# Altium PCB CM4IOv5.PcbDoc (part 2 of 4)
Units mm, origin at the board's own origin, x right, y up, seen from the top; angles counter-clockwise.
Board outline 160 x 90 mm, 4 copper layers (F.Cu, In1.Cu, In2.Cu, B.Cu); 151 components, 247 nets, 944 pads, 782 vias.
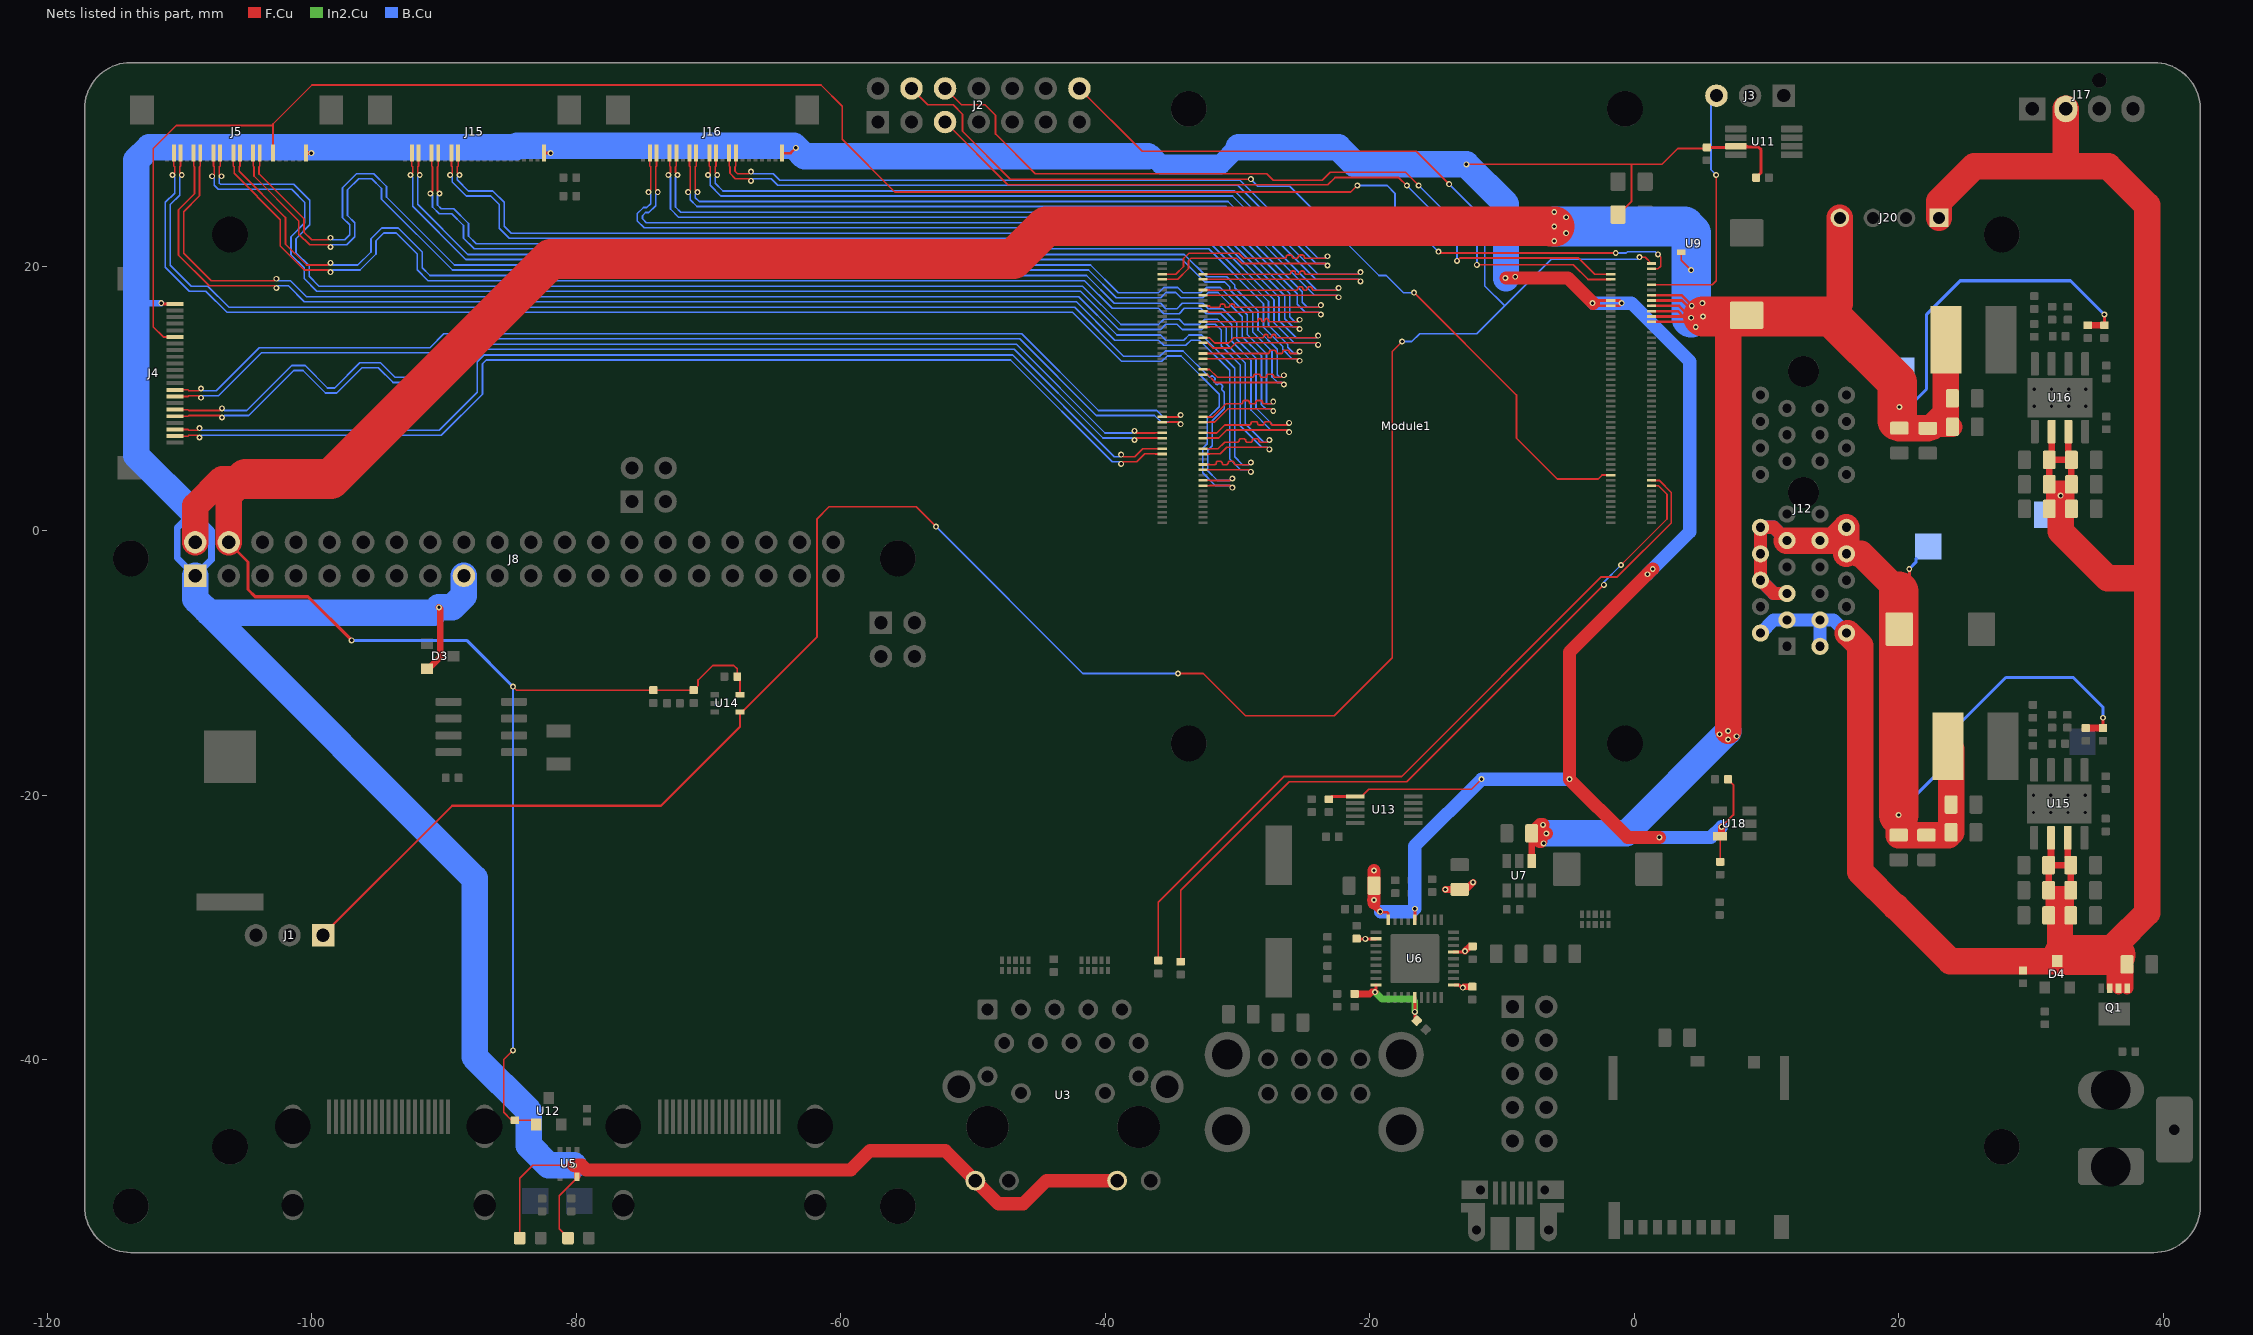
[diagram p4: the nets of this part, all layers, seen from the top]

## Via types
v1: diameter 0.45, hole 0.25, F.Cu to B.Cu, tented both sides, 782 vias

## Nets (pads, with @x,y where several pads share a name; then routed paths per layer and width w, separated by ;. In a path a pad name is that pad's centre, name@x,y a point inside that pad or via, vN(x,y) a via of type N, cw(c..) or ccw(c..) an arc to the next point about the centre after c; other vN are vias at no path point) (continued)
+5v: C2.1 C12.1 C18.1 C22.1 C47.1 C49.1 C51.1 C52.1 C61.1 J8.2 J8.4 J20.4 L5.2 Module1.77 Module1.79 Module1.81 Module1.83 Module1.85 Module1.87 R19.2 R20.2 R27.1 TP4.1 U7.1 U9.5 U12.1 U14.5 | length 367.6
  F.Cu w0.13: C12.1@-84.915,-44.585 -85.5,-44 -85.5,-40 v1(-84.8,-39.3) ; v1(-84.8,-11.8) -84.537,-12.063 R19.2@-74.186,-12.063 R20.2@-71.138,-12.063 -70.804,-11.729 -70.804,-11.304 -69.7,-10.2 -68.1,-10.2 -67.843,-10.457 C22.1@-67.843,-11.04 ; C12.1@-84.635,-44.6 U12.1@-83.35,-44.6 ; U14.5@-67.632,-12.422 C22.1@-67.632,-11.251 ; U9.5@3.55,21.05 3.55,20.45 v1(4.3,19.7)
  F.Cu w0.2: Module1.77@1.3,15.8 4.8,15.8 v1(5.2,16.2) ; Module1.79@1.3,16.2 v1(5.2,16.2) ; Module1.81@1.3,16.6 3.3,16.6 3.7,16.2 ; Module1.83@1.3,17 3.4,17 v1@4.2,16.2 ; Module1.85@1.3,17.4 3.6,17.4 4.8,16.2 ; Module1.87@1.3,17.8 3.6,17.8 v1(5.2,16.2)
  F.Cu w0.23: J8.4@-106.29,-0.93 -104.845,-2.375 -104.845,-4.455 -104.3,-5 -100.3,-5 v1(-97,-8.3) ; C61.1@35.55,15.535 v1(35.55,16.35)
  F.Cu w0.5: U7.1@-7.75,-25 C2.1@-7.75,-22.912 ; R27.1@34.3,15.535 C61.1@35.55,15.535
  F.Cu w1: -7.045,-23.5 -7.162,-23.5 C2.1@-7.762,-22.9 ; v1(-6.9,-22.25) -7.112,-22.25 C2.1@-7.762,-22.9 ; v1(-6.65,-22.9) C2.1@-7.762,-22.9 ; C47.1@23.575,10.487 C47.1@24.063,10 C49.1@24.063,7.85
  F.Cu w1.5: C52.1@22.313,7.85 C49.1@24.063,7.85
  F.Cu w2: J8.2@-108.83,-0.88 -108.83,1.87 -106.8,3.9 -105,3.9 -106.29,2.61 J8.4@-106.29,-0.88 ; v1(7.1,-15.15) 7.1,16.2 ; 14.6,16.2 15.55,17.15 J20.4@15.55,23.65 ; C51.1@20.05,7.75 v1(20.05,9.35) ; C51.1@20.063,7.738 C52.1@22.2,7.737 ; C52.1@22.55,7.85 23.575,8.875 L5.2@23.575,14.45
  F.Cu w3: -105,3.9 -98.583,3.9 -81.941,20.541 -46.959,20.541 -44.481,23.019 -6.337,23.019 -6.318,23 v1@-6,23 ; v1(5.2,16.2) 14.6,16.2 14.9,16.2 19.9,11.2 19.9,8.3
  B.Cu w0.13: v1(-84.8,-39.3) v1@-84.8,-11.75
  B.Cu w0.23: v1(-97,-8.3) -88.3,-8.3 v1(-84.8,-11.8) ; TP4.1@20.15,12.15 20.15,10.55 20.05,10.45 v1(20.05,9.35) 20.75,9.35 22.1,10.7 22.1,16.35 22.125,16.375 24.65,18.9 33,18.9 v1(35.55,16.35)
  B.Cu w2: v1(-6.65,-22.9) -0.6,-22.9 7.1,-15.2 v1(7.1,-15.15)
  B.Cu w3: v1@-6,23 3.8,23 4.3,22.5 v1(4.3,19.7) v1(4.3,16.1)
  other v1: -6.85,-23.65 7.1,-15.8 7.75,-15.55 6.45,-15.4 4.65,15.4 4.35,17 5.15,17.2 -6.05,21.9 -5.15,22.5 -6.05,23 -5.15,23.7 -6.05,24.1
+12v: C25.1 C26.1 C27.1 C28.1 C34.1 C35.1 C37.1 C38.1 C39.1 C40.1 C41.1 C42.1 C43.1 C44.1 D4.1 J12.A2 J12.A3 J12.B1 J12.B2 J12.B3 J17.2 J20.1 Q1.1 Q1.2 Q1.3 TP2.1 U15.2 U15.3 U16.2 U16.3 | length 189.7
  F.Cu w0.23: C40.1@29.4,-33.265 31.285,-33.265 D4.1@32,-32.55
  F.Cu w0.5: C43.1@31.338,-29.012 31.338,-27.163 31.338,-25.312 33.013,-25.312 C28.1@33.013,-27.113 ; C43.1@31.388,-28.962 33.013,-28.962 C28.1@33.013,-27.113 ; C27.1@31.388,-27.113 C28.1@33.013,-27.113 ; C41.1@31.387,1.65 C38.1@31.387,3.5 C34.1@31.387,5.35 C35.1@33.063,5.35 C37.1@33.063,3.55 ; C41.1@31.438,1.7 33.063,1.7 C37.1@33.063,3.55 ; C38.1@31.438,3.55 C37.1@33.063,3.55 ; C25.1@31.515,-25.428 U15.2@31.515,-23.175 ; C34.1@31.565,5.235 U16.2@31.565,7.488 ; C26.1@32.785,-24.677 U15.3@32.785,-23.175 ; C35.1@32.835,5.985 U16.3@32.835,7.488 ; Q1.3@35.975,-34.6 35.975,-32.525 36.4,-32.1
  F.Cu w1: 32.64,27.66 32.75,27.55 ; 36.4,-32.1 37.275,-32.975 Q1.1@37.275,-34.6 ; Q1.2@36.625,-34.6 36.625,-32.325
  F.Cu w2: J12.B2@16.15,-7.75 17.1,-8.7 17.1,-25.813 19.738,-28.45 19.8,-28.45 23.9,-32.55 D4.1@32,-32.55 32.45,-32.1 ; J20.1@23.05,23.65 23.05,24.9 25.7,27.55 32.75,27.55 35.85,27.55 38.8,24.6 38.8,-3.6 ; D4.1@32.2,-32.35 32.2,-28.012 ; v1(32.25,2.65) 32.25,-0.05 35.8,-3.6 38.8,-3.6 ; 32.64,27.66 J17.2@32.64,31.9 ; 36.4,-32.1 36.4,-31.3 38.8,-28.9 38.8,-3.6
  F.Cu w3: 32.45,-32.1 36.4,-32.1
  B.Cu w0.23: TP2.1@32.25,2.2 v1(32.25,2.65)
  B.Cu w1: J12.A2@9.55,-7.75 10.55,-6.75 J12.A3@11.55,-6.75 J12.B3@14.05,-6.75 ; J12.B1@14.05,-8.75 J12.B3@14.05,-6.75 ; J12.B2@16.05,-7.75 15.05,-6.75 J12.B3@14.05,-6.75
/+3.3v: C3.1 C4.1 C6.1 C7.1 C10.1 C11.1 C14.1 C15.1 C23.1 D1.2 D2.2 D3.2 J4.22 J5.22 J8.1 J8.17 J15.22 J16.22 Module1.84 Module1.86 R5.1 R17.1 R21.2 R29.1 U3.15 U3.17 U5.5 U6.5 U6.10 U6.15 U6.23 U6.27 U6.29 U6.36 U11.3 U13.1 U18.5 | length 461.1
  F.Cu w0.13: D1.2@-84.287,-53.5 -84.287,-48.987 -83.3,-48 v1(-80.2,-48) ; D2.2@-80.637,-53.462 -81.3,-52.8 -81.3,-50.3 U5.5@-80.093,-49.093 ; U13.1@-20.5,-20.1 -20.5,-19.968 -20.092,-19.56 -12.31,-19.56 v1(-11.55,-18.8) ; v1(-12.7,27.7) -0.2,27.7 ; R5.1@-1.2,23.9 -0.2,24.9 -0.2,27.7 ; C23.1@5.415,28.9 3.3,28.9 2.1,27.7 -0.2,27.7 ; R17.1@6.5,-25.05 U18.5@6.499,-23.106 ; v1(6.6,-22.4) 7.5,-21.5 7.5,-19.215 R29.1@7.085,-18.8
  F.Cu w0.2: J16.22@-64.45,28.55 -63.81,28.55 v1(-63.405,28.955) ; v1@-19.176,-28.85 -18.7,-28.85 -18.596,-28.954 U6.27@-18.596,-29.43 ; v1@-3.1,17.1 -3.1,17.2 -2.9,17.4 Module1.86@-1.78,17.4 -1.1,17.4 -0.9,17.2 -1.1,17 Module1.84@-1.78,17 -3,17 v1@-3.1,17.1
  F.Cu w0.23: v1(-111.4,17.2) -111.35,17.15 J4.22@-110.35,17.15 ; J15.22@-82.45,28.55 v1(-81.95,28.55) ; C7.1@-22.885,-20.1 U13.1@-21.1,-20.1 ; C14.1@-20.981,-30.868 U6.29@-19.533,-30.868 ; v1(-19.6,-34.9) -19.533,-34.833 U6.36@-19.533,-34.368 ; C15.1@-16.596,-36.919 v1(-16.596,-36.396) U6.5@-16.596,-35.305 ; U6.23@-16.596,-29.43 v1(-16.596,-28.596) ; U6.15@-13.658,-31.868 v1@-12.868,-31.868 ; U6.10@-13.594,-34.368 -13.232,-34.368 -13.2,-34.4 v1@-13.036,-34.564 ; C23.1@5.5,28.985 U11.3@7.598,28.985 ; U11.3@7.688,29.075 8.5,29.075 8.575,29 9.4,29 9.6,28.8 9.6,27.085 R21.2@9.215,26.7
  F.Cu w0.3: J5.22@-100.45,28.55 v1(-100.05,28.55)
  F.Cu w0.5: D3.2@-91.2,-10.45 -90.3,-9.55 -90.3,-5.9 v1(-90.4,-5.8) ; U5.5@-79.95,-48.85 -79.95,-48.405 ; C3.1@-21.15,-35.04 -20.017,-35.04 -19.857,-34.88 v1@-19.6,-34.88 ; v1@-19.7,-27.925 -19.684,-28.342 v1(-19.213,-28.813) ; v1@-19.684,-28.135 C10.1@-19.684,-26.844 ; v1(-14.287,-27.137) C6.1@-13.2,-27.137 ; v1@-12.887,-34.487 C11.1@-12.24,-34.487 ; v1(-12.8,-31.8) C4.1@-12.44,-31.44 ; C6.1@-12.725,-27.137 v1(-12.187,-26.6) ; U18.5@6.6,-23.005 v1(6.6,-22.4)
  F.Cu w1: v1(-80.2,-48) -79.6,-48 -79.25,-48.35 -59.25,-48.35 -57.8,-46.9 -52.09,-46.9 U3.15@-49.83,-49.16 -48.09,-50.9 -46.2,-50.9 -44.46,-49.16 U3.17@-39.11,-49.16 ; v1@-19.7,-27.925 v1(-19.684,-27.941) ; v1@-19.684,-28.135 v1(-19.684,-27.941) ; v1(-19.684,-25.709) C10.1@-19.684,-26.844 v1(-19.684,-27.941) ; v1@-9.7,19.1 -5,19.1 v1@-3.1,17.2 ; v1(1.4,-2.9) -4.9,-9.2 v1(-4.9,-18.8) -0.5,-23.2 v1(1.9,-23.2)
  In2.Cu w0.5: v1(-19.6,-34.9) -19.075,-35.425 -16.775,-35.425 -16.596,-35.604 v1(-16.596,-36.396)
  B.Cu w0.5: -113.3,17.5 -113,17.2 v1(-111.4,17.2) ; v1(-19.684,-27.941) -19.684,-28.342 v1(-19.213,-28.813) ; -110.2,-2.05 J8.1@-108.83,-3.42 -107.6,-2.19 -107.6,0 -109,1.4 -110.2,0.2 -110.2,-2.05
  B.Cu w1: v1@-19.2,-28.8 -19.175,-28.825 -16.825,-28.825 v1(-16.596,-28.596) -16.596,-23.846 v1(-11.55,-18.8) v1(-4.9,-18.8) ; v1@-3.1,17.2 -0.2,17.2 4.2,12.8 4.2,-0.1 v1(1.4,-2.9) v1(1,-3.3) ; v1(1.9,-23.2) 5.8,-23.2 v1(6.6,-22.4)
  B.Cu w1.5: -36.6,28.5 -35.8,27.7 -31.3,27.7 -30,29
  B.Cu w2: -109,1.4 -113.3,5.7 -113.3,17.5 -113.3,28 -112.305,28.995 -93.105,28.995 -93.1,29 ; J8.1@-108.83,-3.42 -108.83,-5.17 -108.7,-5.3 -107.8,-6.2 ; -93,29 -84.809,29 ; J8.17@-88.51,-3.42 -88.51,-4.91 -89.4,-5.8 v1(-90.4,-5.8) -90.8,-6.2 -107.8,-6.2 ; -84.596,28.995 -84.491,29.1 -63.55,29.1 v1(-63.405,28.955) -62.75,28.3 -36.8,28.3 ; v1(-80.2,-48) -82.1,-48 -83.6,-46.5 -83.6,-43.9 -87.7,-39.8 -87.7,-26.3 -107.8,-6.2 ; -29.9,29 -22.4,29 -21.1,27.7 v1(-12.7,27.7) -9.7,24.7 v1@-9.7,19.1
  other v1: -12.964,-34.564 -20.332,-30.868 -3.15,17.2 -0.95,17.2 -9.75,19.1 -9,19.2
/PCIe-connector/+3.3v: C30.1 C31.1 C32.1 C33.1 C45.1 C65.1 J12.A5 J12.A6 J12.A8 J12.A9 J12.A10 J12.B8 J12.B9 J12.B10 L3.2 R24.1 TP1.1 | length 94.8
  F.Cu w0.23: 20,-4.6 20.8,-3.8 v1(20.8,-2.9) ; C65.1@35.45,-14.927 v1(35.45,-14.15) v1@35.45,-14.05
  F.Cu w0.5: 20,-15.443 20,-13.2 20.3,-12.9 ; R24.1@34.15,-14.927 C65.1@35.45,-14.927
  F.Cu w1: J12.A5@11.55,-4.75 10.55,-4.75 J12.A6@9.55,-3.75 J12.A8@9.55,-1.75 J12.A10@9.55,0.25 10.55,0.25 J12.A9@11.55,-0.75
  F.Cu w2: J12.A9@11.55,-0.75 J12.B9@14.05,-0.75 15.05,-0.75 J12.B10@16.05,0.25 J12.B8@16.05,-1.75 ; 16.969,-1.75 17.15,-1.75 20,-4.6 ; v1(20,-21.5) C33.1@20,-23.025 C31.1@23.75,-23.025 ; C31.1@23.963,-22.812 C30.1@23.963,-20.713 L3.2@23.963,-16.55
  F.Cu w3: v1(20,-21.5) 20,-15.5 ; 20,-15.443 20,-4.6
  B.Cu w0.23: v1(20,-21.5) 20,-21.3 23.7,-17.6 23.7,-15.5 28.1,-11.1 33.2,-11.1 35.45,-13.35 v1(35.45,-14.15) ; v1(20.8,-2.9) 21.3,-2.4 TP1.1@21.3,-2.1
  B.Cu w1: J12.A5@11.55,-4.75 10.55,-4.75 J12.A6@9.55,-3.75 J12.A10@9.55,0.25 10.55,0.25 J12.A9@11.55,-0.75 J12.B9@14.05,-0.75 15.05,-0.75 J12.B10@16.05,0.25 J12.B8@16.05,-1.75
AIN0: J2.5 Module1.96 | length 56.9
  F.Cu w0.13: J2.5@-52.12,30.9 -47.38,26.16 -23.172,26.16 -22.632,26.7 -17.8,26.7 v1(-17.2,26.1) ; v1(-13.4,20.4) -13.175,20.625 -4.225,20.625 -3,19.4 Module1.96@-1.78,19.4
  B.Cu w0.13: v1(-17.2,26.1) -13.4,22.3 v1(-13.4,20.4)
AIN1: J2.6 Module1.94 | length 58.6
  F.Cu w0.13: J2.6@-52.12,33.44 -50.88,32.2 -49.1,32.2 -48.3,31.4 -48.3,30 -45.3,27 -27.8,27 -27.3,26.5 -23.6,26.5 -23,27.1 -17.3,27.1 v1(-16.3,26.1) ; v1(-11.9,20.1) -4.6,20.1 -3.5,19 Module1.94@-1.78,19
  B.Cu w0.13: v1(-16.3,26.1) -11.9,21.7 v1(-11.9,20.1)
BT_nDis: J3.3 Module1.91 | length 18.8
  F.Cu w0.13: Module1.91@1.3,18.6 5.9,18.6 6.2,18.9 v1(6.2,26.9)
  B.Cu w0.13: J3.3@5.8,32.48 5.8,27.3 v1(6.2,26.9)
CAM0_C_N: J4.8 Module1.140 | length 82.1
  F.Cu w0.127: J4.8@-110.35,10.15 -109.375,10.15 -109.315,10.21 -108.56,10.21 v1(-108.4,10.05) ; Module1.140@-35.7,8.2 -35.175,8.2 -35.165,8.21 -34.46,8.21 v1(-34.3,8.05)
  B.Cu w0.127: v1(-108.4,10.05) -108.24,10.21 -107.071,10.21 -103.821,13.46 -90.921,13.46 -89.871,14.51 -46.479,14.51 -40.679,8.71 -36.279,8.71 -35.779,8.21 -34.46,8.21 v1(-34.3,8.05)
CAM0_C_P: J4.9 Module1.142 | length 82.1
  F.Cu w0.127: J4.9@-110.35,10.65 -109.375,10.65 -109.315,10.59 -108.56,10.59 v1(-108.4,10.75) ; Module1.142@-35.7,8.6 -35.175,8.6 -35.165,8.59 -34.46,8.59 v1(-34.3,8.75)
  B.Cu w0.127: v1(-108.4,10.75) -108.24,10.59 -107.229,10.59 -103.979,13.84 -91.079,13.84 -90.029,14.89 -46.321,14.89 -40.521,9.09 -36.121,9.09 -35.621,8.59 -34.46,8.59 v1(-34.3,8.75)
CAM0_D0_N: J4.2 Module1.128 | length 82.1
  F.Cu w0.127: J4.2@-110.35,7.15 -109.375,7.15 -109.315,7.21 -108.66,7.21 v1(-108.5,7.05) ; v1(-38.8,5.05) -38.64,5.21 -37.621,5.21 -37.021,5.81 -36.235,5.81 -36.225,5.8 Module1.128@-35.7,5.8
  B.Cu w0.127: v1(-108.5,7.05) -108.34,7.21 -90.221,7.21 -87.11,10.321 -87.11,12.621 -86.821,12.91 -47.179,12.91 -39.479,5.21 -38.96,5.21 v1(-38.8,5.05)
CAM0_D0_P: J4.3 Module1.130 | length 82.1
  F.Cu w0.127: J4.3@-110.35,7.65 -109.375,7.65 -109.315,7.59 -108.66,7.59 v1(-108.5,7.75) ; v1(-38.8,5.75) -38.64,5.59 -37.779,5.59 -37.179,6.19 -36.235,6.19 -36.225,6.2 Module1.130@-35.7,6.2
  B.Cu w0.127: v1(-108.5,7.75) -108.34,7.59 -90.379,7.59 -87.49,10.479 -87.49,12.779 -86.979,13.29 -47.021,13.29 -39.321,5.59 -38.96,5.59 v1(-38.8,5.75)
CAM0_D1_N: J4.5 Module1.134 | length 82.1
  F.Cu w0.127: J4.5@-110.35,8.65 -109.375,8.65 -109.315,8.71 -106.96,8.71 v1(-106.8,8.55) ; v1(-37.8,6.85) -37.64,7.01 -36.235,7.01 -36.225,7 Module1.134@-35.7,7
  B.Cu w0.127: v1(-106.8,8.55) -106.64,8.71 -104.771,8.71 -101.371,12.11 -100.679,12.11 -98.979,10.41 -98.121,10.41 -96.221,12.31 -94.979,12.31 -93.879,11.21 -91.271,11.21 -88.771,13.71 -46.879,13.71 -40.179,7.01 -37.96,7.01 v1(-37.8,6.85)
CAM0_D1_P: J4.6 Module1.136 | length 82.1
  F.Cu w0.127: J4.6@-110.35,9.15 -109.375,9.15 -109.315,9.09 -106.96,9.09 v1(-106.8,9.25) ; v1(-37.8,7.55) -37.64,7.39 -36.235,7.39 -36.225,7.4 Module1.136@-35.7,7.4
  B.Cu w0.127: v1(-106.8,9.25) -106.64,9.09 -104.929,9.09 -101.529,12.49 -100.521,12.49 -98.821,10.79 -98.279,10.79 -96.379,12.69 -94.821,12.69 -93.721,11.59 -91.429,11.59 -88.929,14.09 -46.721,14.09 -40.021,7.39 -37.96,7.39 v1(-37.8,7.55)
CAM1_C_N: J5.8 Module1.127 | length 104.3
  F.Cu w0.127: v1(-107.55,26.8) -107.39,26.96 -107.39,27.515 -107.45,27.575 J5.8@-107.45,28.55 ; Module1.127@-32.62,5.8 -32.095,5.8 -32.085,5.81 -31.321,5.81 -30.821,6.31 -27.76,6.31 v1(-27.6,6.15)
  B.Cu w0.127: v1(-107.55,26.8) -107.39,26.64 -107.39,26.121 -107.079,25.81 -101.529,25.81 -100.54,24.821 -100.54,23.279 -101.59,22.229 -101.59,20.871 -100.59,19.871 -100.59,19.071 -99.629,18.11 -41.879,18.11 -38.979,15.21 -35.821,15.21 -35.421,15.61 -34.579,15.61 -34.179,15.21 -32.721,15.21 -32.321,15.61 -31.679,15.61 -31.24,15.171 -31.24,13.971 -29.79,12.521 -29.79,7.921 -28.179,6.31 -27.76,6.31 v1(-27.6,6.15)
CAM1_C_P: J5.9 Module1.129 | length 104.2
  F.Cu w0.127: J5.9@-106.95,28.55 -106.95,27.575 -107.01,27.515 -107.01,26.96 v1(-106.85,26.8) ; Module1.129@-32.62,6.2 -32.095,6.2 -32.085,6.19 -31.479,6.19 -30.979,6.69 -30.01,6.69 -29.982,6.693 -29.956,6.702 -29.932,6.717 -29.912,6.737 -29.897,6.761 -29.888,6.787 -29.882,6.843 -29.873,6.869 -29.858,6.893 -29.838,6.913 -29.814,6.928 -29.788,6.937 -29.76,6.94 -29.51,6.94 -29.482,6.937 -29.456,6.928 -29.432,6.913 -29.412,6.893 -29.397,6.869 -29.388,6.843 -29.382,6.787 -29.373,6.761 -29.358,6.737 -29.338,6.717 -29.314,6.702 -29.288,6.693 -29.26,6.69 -29.01,6.69 -28.982,6.693 -28.956,6.702 -28.932,6.717 -28.912,6.737 -28.897,6.761 -28.888,6.787 -28.882,6.843 -28.873,6.869 -28.858,6.893 -28.838,6.913 -28.814,6.928 -28.788,6.937 -28.76,6.94 -28.51,6.94 -28.482,6.937 -28.456,6.928 -28.432,6.913 -28.412,6.893 -28.397,6.869 -28.388,6.843 -28.382,6.787 -28.373,6.761 -28.358,6.737 -28.338,6.717 -28.314,6.702 -28.288,6.693 -28.26,6.69 -27.76,6.69 v1(-27.6,6.85)
  B.Cu w0.127: v1(-106.85,26.8) -107.01,26.64 -107.01,26.279 -106.921,26.19 -101.371,26.19 -100.16,24.979 -100.16,23.121 -101.21,22.071 -101.21,21.029 -100.21,20.029 -100.21,19.229 -99.471,18.49 -41.721,18.49 -38.821,15.59 -35.979,15.59 -35.579,15.99 -34.421,15.99 -34.021,15.59 -32.879,15.59 -32.479,15.99 -31.521,15.99 -30.86,15.329 -30.86,14.129 -29.41,12.679 -29.41,8.079 -28.021,6.69 -27.76,6.69 v1(-27.6,6.85)
CAM1_D0_N: J5.2 Module1.115 | length 104.5
  F.Cu w0.127: v1(-110.55,26.9) -110.39,27.06 -110.39,27.515 -110.45,27.575 J5.2@-110.45,28.55 ; Module1.115@-32.62,3.4 -32.095,3.4 -32.085,3.41 -30.56,3.41 v1(-30.4,3.25)
  B.Cu w0.127: v1(-110.55,26.9) -110.39,26.74 -110.39,25.529 -111.09,24.829 -111.09,19.921 -109.279,18.11 -108.029,18.11 -106.429,16.51 -42.479,16.51 -38.779,12.81 -35.721,12.81 -35.321,13.21 -34.279,13.21 -31.39,10.321 -31.39,9.379 -32.29,8.479 -32.29,6.579 -32.64,6.229 -32.64,4.371 -31.679,3.41 -30.56,3.41 v1(-30.4,3.25)
CAM1_D0_P: J5.3 Module1.117 | length 104.5
  F.Cu w0.127: J5.3@-109.95,28.55 -109.95,27.575 -110.01,27.515 -110.01,27.06 v1(-109.85,26.9) ; Module1.117@-32.62,3.8 -32.095,3.8 -32.085,3.79 -30.56,3.79 v1(-30.4,3.95)
  B.Cu w0.127: v1(-109.85,26.9) -110.01,26.74 -110.01,25.371 -110.71,24.671 -110.71,20.079 -109.121,18.49 -107.871,18.49 -106.271,16.89 -42.321,16.89 -38.621,13.19 -35.879,13.19 -35.479,13.59 -34.121,13.59 -32.191,11.66 -32.169,11.642 -32.144,11.63 -32.117,11.624 -32.089,11.624 -32.061,11.63 -32.036,11.642 -31.992,11.677 -31.967,11.689 -31.94,11.695 -31.912,11.695 -31.885,11.689 -31.859,11.677 -31.837,11.66 -31.731,11.554 -31.714,11.532 -31.702,11.506 -31.696,11.479 -31.696,11.451 -31.702,11.424 -31.714,11.399 -31.749,11.355 -31.761,11.33 -31.767,11.302 -31.767,11.274 -31.761,11.247 -31.749,11.222 -31.731,11.2 -31.625,11.094 -31.603,11.077 -31.578,11.064 -31.551,11.058 -31.523,11.058 -31.496,11.064 -31.47,11.077 -31.427,11.111 -31.401,11.124 -31.374,11.13 -31.346,11.13 -31.319,11.124 -31.294,11.111 -31.272,11.094 -31.166,10.988 -31.148,10.966 -31.136,10.941 -31.13,10.914 -31.13,10.886 -31.136,10.858 -31.148,10.833 -31.183,10.789 -31.195,10.764 -31.201,10.737 -31.201,10.709 -31.195,10.681 -31.183,10.656 -31.166,10.634 -31.01,10.479 -31.01,9.221 -31.91,8.321 -31.91,6.421 -32.26,6.071 -32.26,4.529 -31.521,3.79 -30.56,3.79 v1(-30.4,3.95)
CAM1_D1_N: J5.5 Module1.121 | length 104.2
  F.Cu w0.127: J5.5@-108.95,28.55 -108.95,27.575 -108.89,27.515 -108.89,25.479 -110.09,24.279 -110.09,20.821 -107.779,18.51 -102.86,18.51 v1(-102.7,18.35) ; Module1.121@-32.62,4.6 -32.095,4.6 -32.085,4.61 -29.16,4.61 v1(-29,4.45)
  B.Cu w0.127: v1(-102.7,18.35) -102.54,18.51 -101.779,18.51 -100.579,17.31 -42.179,17.31 -39.279,14.41 -35.979,14.41 -35.579,14.01 -33.921,14.01 -33.521,14.41 -32.879,14.41 -30.59,12.121 -30.59,5.421 -29.779,4.61 -29.16,4.61 v1(-29,4.45)
CAM1_D1_P: J5.6 Module1.123 | length 104.1
  F.Cu w0.127: J5.6@-108.45,28.55 -108.45,27.575 -108.51,27.515 -108.51,25.321 -109.71,24.121 -109.71,20.979 -107.621,18.89 -102.86,18.89 v1(-102.7,19.05) ; Module1.123@-32.62,5 -32.095,5 -32.085,4.99 -31.74,4.99 -31.712,4.993 -31.686,5.002 -31.662,5.017 -31.642,5.037 -31.627,5.061 -31.618,5.087 -31.612,5.143 -31.603,5.169 -31.588,5.193 -31.568,5.213 -31.544,5.228 -31.518,5.237 -31.49,5.24 -31.29,5.24 -31.262,5.237 -31.236,5.228 -31.212,5.213 -31.192,5.193 -31.177,5.169 -31.168,5.143 -31.162,5.087 -31.153,5.061 -31.138,5.037 -31.118,5.017 -31.094,5.002 -31.068,4.993 -31.04,4.99 -30.84,4.99 -30.812,4.993 -30.786,5.002 -30.762,5.017 -30.742,5.037 -30.727,5.061 -30.718,5.087 -30.712,5.143 -30.703,5.169 -30.688,5.193 -30.668,5.213 -30.644,5.228 -30.618,5.237 -30.59,5.24 -30.39,5.24 -30.362,5.237 -30.336,5.228 -30.312,5.213 -30.292,5.193 -30.277,5.169 -30.268,5.143 -30.262,5.087 -30.253,5.061 -30.238,5.037 -30.218,5.017 -30.194,5.002 -30.168,4.993 -30.14,4.99 -29.16,4.99 v1(-29,5.15)
  B.Cu w0.127: v1(-102.7,19.05) -102.54,18.89 -101.621,18.89 -100.421,17.69 -42.021,17.69 -39.121,14.79 -35.821,14.79 -35.421,14.39 -34.079,14.39 -33.679,14.79 -32.721,14.79 -30.21,12.279 -30.21,5.579 -29.621,4.99 -29.16,4.99 v1(-29,5.15)
CAM1_D2_N: J5.11 Module1.133 | length 104.5
  F.Cu w0.127: J5.11@-105.95,28.55 -105.95,27.575 -105.89,27.515 -105.89,27.021 -102.39,23.521 -102.39,21.521 -100.579,19.71 -98.76,19.71 v1(-98.6,19.55) ; Module1.133@-32.62,7 -32.095,7 -32.085,7.01 -31.421,7.01 -30.821,7.61 -26.26,7.61 v1(-26.1,7.45)
  B.Cu w0.127: v1(-98.6,19.55) -98.44,19.71 -96.371,19.71 -95.16,20.921 -95.16,21.921 -94.571,22.51 -93.629,22.51 -92.04,20.921 -92.04,19.721 -91.229,18.91 -41.579,18.91 -39.479,16.81 -35.979,16.81 -35.579,16.41 -34.421,16.41 -34.021,16.81 -32.779,16.81 -32.379,16.41 -31.279,16.41 -30.44,15.571 -30.44,14.321 -28.99,12.871 -28.99,9.121 -27.479,7.61 -26.26,7.61 v1(-26.1,7.45)
CAM1_D2_P: J5.12 Module1.135 | length 104.4
  F.Cu w0.127: J5.12@-105.45,28.55 -105.45,27.575 -105.51,27.515 -105.51,27.179 -102.01,23.679 -102.01,21.679 -100.421,20.09 -98.76,20.09 v1(-98.6,20.25) ; Module1.135@-32.62,7.4 -32.095,7.4 -32.085,7.39 -31.579,7.39 -30.979,7.99 -29.11,7.99 -29.082,7.993 -29.056,8.002 -29.032,8.017 -29.012,8.037 -28.997,8.061 -28.988,8.087 -28.982,8.143 -28.973,8.169 -28.958,8.193 -28.938,8.213 -28.914,8.228 -28.888,8.237 -28.86,8.24 -28.61,8.24 -28.582,8.237 -28.556,8.228 -28.532,8.213 -28.512,8.193 -28.497,8.169 -28.488,8.143 -28.482,8.087 -28.473,8.061 -28.458,8.037 -28.438,8.017 -28.414,8.002 -28.388,7.993 -28.36,7.99 -28.11,7.99 -28.082,7.993 -28.056,8.002 -28.032,8.017 -28.012,8.037 -27.997,8.061 -27.988,8.087 -27.982,8.143 -27.973,8.169 -27.958,8.193 -27.938,8.213 -27.914,8.228 -27.888,8.237 -27.86,8.24 -27.61,8.24 -27.582,8.237 -27.556,8.228 -27.532,8.213 -27.512,8.193 -27.497,8.169 -27.488,8.143 -27.482,8.087 -27.473,8.061 -27.458,8.037 -27.438,8.017 -27.414,8.002 -27.388,7.993 -27.36,7.99 -26.26,7.99 v1(-26.1,8.15)
  B.Cu w0.127: v1(-98.6,20.25) -98.44,20.09 -96.529,20.09 -95.54,21.079 -95.54,22.079 -94.729,22.89 -93.471,22.89 -91.66,21.079 -91.66,19.879 -91.071,19.29 -41.421,19.29 -39.321,17.19 -35.821,17.19 -35.421,16.79 -34.579,16.79 -34.179,17.19 -32.621,17.19 -32.221,16.79 -31.121,16.79 -30.06,15.729 -30.06,14.479 -28.61,13.029 -28.61,9.279 -27.321,7.99 -26.26,7.99 v1(-26.1,8.15)
CAM1_D3_N: J5.14 Module1.139 | length 103.9
  F.Cu w0.127: J5.14@-104.45,28.55 -104.45,27.575 -104.39,27.515 -104.39,26.821 -100.99,23.421 -100.99,22.421 -100.179,21.61 -98.76,21.61 v1(-98.6,21.45) ; Module1.139@-32.62,8.2 -32.095,8.2 -32.085,8.21 -31.721,8.21 -30.721,9.21 -27.46,9.21 v1(-27.3,9.05)
  B.Cu w0.127: v1(-98.6,21.45) -98.44,21.61 -97.371,21.61 -96.76,22.221 -96.76,23.279 -97.31,23.829 -97.31,25.771 -96.471,26.61 -95.479,26.61 -94.74,25.871 -94.74,25.071 -89.379,19.71 -41.279,19.71 -39.179,17.61 -35.821,17.61 -35.421,18.01 -34.679,18.01 -34.279,17.61 -32.621,17.61 -32.221,18.01 -31.479,18.01 -29.64,16.171 -29.64,14.671 -28.19,13.221 -28.19,9.521 -27.879,9.21 -27.46,9.21 v1(-27.3,9.05)
CAM1_D3_P: J5.15 Module1.141 | length 103.8
  F.Cu w0.127: J5.15@-103.95,28.55 -103.95,27.575 -104.01,27.515 -104.01,26.979 -100.61,23.579 -100.61,22.579 -100.021,21.99 -98.76,21.99 v1(-98.6,22.15) ; Module1.141@-32.62,8.6 -32.095,8.6 -32.085,8.59 -31.879,8.59 -30.879,9.59 -29.74,9.59 -29.712,9.593 -29.686,9.602 -29.662,9.617 -29.642,9.637 -29.627,9.661 -29.618,9.687 -29.612,9.743 -29.603,9.769 -29.588,9.793 -29.568,9.813 -29.544,9.828 -29.518,9.837 -29.49,9.84 -29.24,9.84 -29.212,9.837 -29.186,9.828 -29.162,9.813 -29.142,9.793 -29.127,9.769 -29.118,9.743 -29.112,9.687 -29.103,9.661 -29.088,9.637 -29.068,9.617 -29.044,9.602 -29.018,9.593 -28.99,9.59 -28.74,9.59 -28.712,9.593 -28.686,9.602 -28.662,9.617 -28.642,9.637 -28.627,9.661 -28.618,9.687 -28.612,9.743 -28.603,9.769 -28.588,9.793 -28.568,9.813 -28.544,9.828 -28.518,9.837 -28.49,9.84 -28.24,9.84 -28.212,9.837 -28.186,9.828 -28.162,9.813 -28.142,9.793 -28.127,9.769 -28.118,9.743 -28.112,9.687 -28.103,9.661 -28.088,9.637 -28.068,9.617 -28.044,9.602 -28.018,9.593 -27.99,9.59 -27.46,9.59 v1(-27.3,9.75)
  B.Cu w0.127: v1(-98.6,22.15) -98.44,21.99 -97.529,21.99 -97.14,22.379 -97.14,23.121 -97.69,23.671 -97.69,25.929 -96.629,26.99 -95.321,26.99 -94.36,26.029 -94.36,25.229 -89.221,20.09 -41.121,20.09 -39.021,17.99 -35.979,17.99 -35.579,18.39 -34.521,18.39 -34.121,17.99 -32.779,17.99 -32.379,18.39 -31.321,18.39 -29.26,16.329 -29.26,14.829 -27.81,13.379 -27.81,9.679 -27.721,9.59 -27.46,9.59 v1(-27.3,9.75)
CAM_GPIO: J4.17 J5.17 Module1.97 | length 143.1
  F.Cu w0.13: J4.17@-110.35,14.65 -111.25,14.65 -112,15.4 -112,28.9 -110.26,30.64 -102.95,30.64 ; J5.17@-102.95,28.55 -102.95,30.64 ; v1(-20.945,26.1) -21.43,25.615 -55.915,25.615 -59.9,29.6 -59.9,32.1 -61.5,33.7 -100,33.7 -102.95,30.75 -102.95,30.64 ; v1(-14.8,21.1) -14.7,21 v1(-1.4,21) ; Module1.97@1.3,19.8 1.8,19.8 2,20 2,20.7 v1(1.8,20.9)
  B.Cu w0.13: v1(-20.945,26.1) -18.678,26.1 -18.1,25.522 -18.1,24.4 v1(-14.8,21.1) ; v1(-1.4,21) -0.6,21 -0.5,21.1 1.6,21.1 v1(1.8,20.9)
DSI0_C_N: J15.8 Module1.169 | length 83.8
  F.Cu w0.127: v1(-89.55,26.9) -89.39,27.06 -89.39,27.515 -89.45,27.575 J15.8@-89.45,28.55 ; Module1.169@-32.279,14.21 -31.879,13.81 -30.521,13.81 -30.121,14.21 -24.06,14.21 v1(-23.9,14.05)
  B.Cu w0.127: v1(-89.55,26.9) -89.39,26.74 -89.39,26.371 -88.329,25.31 -86.479,25.31 -85.84,24.671 -85.84,22.871 -85.079,22.11 -31.879,22.11 -27.24,17.471 -27.24,15.721 -25.729,14.21 -24.06,14.21 v1(-23.9,14.05)
DSI0_C_P: J15.9 Module1.171 | length 83.8
  F.Cu w0.127: J15.9@-88.95,28.55 -88.95,27.575 -89.01,27.515 -89.01,27.06 v1(-88.85,26.9) ; Module1.171@-32.36,14.59 -32.121,14.59 -31.721,14.19 -30.679,14.19 -30.279,14.59 -28.135,14.59 -28.108,14.593 -28.082,14.602 -28.059,14.617 -28.039,14.636 -28.025,14.659 -28.016,14.685 -28.01,14.74 -28,14.766 -27.986,14.789 -27.966,14.808 -27.943,14.823 -27.917,14.832 -27.89,14.835 -27.835,14.835 -27.808,14.832 -27.782,14.823 -27.759,14.808 -27.739,14.789 -27.725,14.766 -27.716,14.74 -27.71,14.685 -27.7,14.659 -27.686,14.636 -27.666,14.617 -27.643,14.602 -27.617,14.593 -27.59,14.59 -27.535,14.59 -27.508,14.593 -27.482,14.602 -27.459,14.617 -27.439,14.636 -27.425,14.659 -27.416,14.685 -27.41,14.74 -27.4,14.766 -27.386,14.789 -27.366,14.808 -27.343,14.823 -27.317,14.832 -27.29,14.835 -27.235,14.835 -27.208,14.832 -27.182,14.823 -27.159,14.808 -27.139,14.789 -27.125,14.766 -27.116,14.74 -27.11,14.685 -27.1,14.659 -27.086,14.636 -27.066,14.617 -27.043,14.602 -27.017,14.593 -26.99,14.59 -24.06,14.59 v1(-23.9,14.75)
  B.Cu w0.127: v1(-88.85,26.9) -89.01,26.74 -89.01,26.529 -88.171,25.69 -86.321,25.69 -85.46,24.829 -85.46,23.029 -84.921,22.49 -31.721,22.49 -26.86,17.629 -26.86,15.879 -25.571,14.59 -24.06,14.59 v1(-23.9,14.75)
DSI0_D0_N: J15.2 Module1.157 | length 83.9
  F.Cu w0.127: v1(-92.55,26.9) -92.39,27.06 -92.39,27.515 -92.45,27.575 J15.2@-92.45,28.55 ; Module1.157@-32.279,11.81 -31.679,11.21 -26.66,11.21 v1(-26.5,11.05)
  B.Cu w0.127: v1(-92.55,26.9) -92.39,26.74 -92.39,24.521 -88.379,20.51 -34.179,20.51 -32.479,18.81 -30.979,18.81 -30.59,18.421 -30.59,18.221 -28.84,16.471 -28.84,15.021 -27.39,13.571 -27.39,11.621 -26.979,11.21 -26.66,11.21 v1(-26.5,11.05)
DSI0_D0_P: J15.3 Module1.159 | length 83.9
  F.Cu w0.127: J15.3@-91.95,28.55 -91.95,27.575 -92.01,27.515 -92.01,27.06 v1(-91.85,26.9) ; Module1.159@-32.36,12.19 -32.121,12.19 -31.521,11.59 -28.905,11.59 -28.878,11.593 -28.852,11.602 -28.829,11.617 -28.809,11.636 -28.795,11.659 -28.786,11.685 -28.78,11.74 -28.77,11.766 -28.756,11.789 -28.736,11.808 -28.713,11.823 -28.687,11.832 -28.66,11.835 -28.405,11.835 -28.378,11.832 -28.352,11.823 -28.329,11.808 -28.309,11.789 -28.295,11.766 -28.286,11.74 -28.28,11.685 -28.27,11.659 -28.256,11.636 -28.236,11.617 -28.213,11.602 -28.187,11.593 -28.16,11.59 -27.905,11.59 -27.878,11.593 -27.852,11.602 -27.829,11.617 -27.809,11.636 -27.795,11.659 -27.786,11.685 -27.78,11.74 -27.77,11.766 -27.756,11.789 -27.736,11.808 -27.713,11.823 -27.687,11.832 -27.66,11.835 -27.405,11.835 -27.378,11.832 -27.352,11.823 -27.329,11.808 -27.309,11.789 -27.295,11.766 -27.286,11.74 -27.28,11.685 -27.27,11.659 -27.256,11.636 -27.236,11.617 -27.213,11.602 -27.187,11.593 -27.16,11.59 -26.66,11.59 v1(-26.5,11.75)
  B.Cu w0.127: v1(-91.85,26.9) -92.01,26.74 -92.01,24.679 -88.221,20.89 -34.021,20.89 -32.321,19.19 -30.821,19.19 -30.21,18.579 -30.21,18.379 -28.46,16.629 -28.46,15.179 -27.01,13.729 -27.01,11.779 -26.821,11.59 -26.66,11.59 v1(-26.5,11.75)
DSI0_D1_N: J15.5 Module1.163 | length 83.8
  F.Cu w0.127: v1(-91.05,25.5) -90.89,25.66 -90.89,27.515 -90.95,27.575 J15.5@-90.95,28.55 ; Module1.163@-32.62,13 -32.095,13 -32.085,13.01 -25.46,13.01 v1(-25.3,12.85)
  B.Cu w0.127: v1(-91.05,25.5) -90.89,25.34 -90.89,24.471 -90.379,23.96 -89.429,23.96 -88.54,23.071 -88.54,22.121 -87.729,21.31 -32.179,21.31 -28.04,17.171 -28.04,15.371 -26.59,13.921 -26.59,13.721 -25.879,13.01 -25.46,13.01 v1(-25.3,12.85)
DSI0_D1_P: J15.6 Module1.165 | length 83.7
  F.Cu w0.127: J15.6@-90.45,28.55 -90.45,27.575 -90.51,27.515 -90.51,25.66 v1(-90.35,25.5) ; Module1.165@-32.62,13.4 -32.095,13.4 -32.085,13.39 -27.71,13.39 -27.682,13.393 -27.656,13.402 -27.632,13.417 -27.612,13.437 -27.597,13.461 -27.588,13.487 -27.582,13.543 -27.573,13.569 -27.558,13.593 -27.538,13.613 -27.514,13.628 -27.488,13.637 -27.46,13.64 -27.21,13.64 -27.182,13.637 -27.156,13.628 -27.132,13.613 -27.112,13.593 -27.097,13.569 -27.088,13.543 -27.082,13.487 -27.073,13.461 -27.058,13.437 -27.038,13.417 -27.014,13.402 -26.988,13.393 -26.96,13.39 -26.71,13.39 -26.682,13.393 -26.656,13.402 -26.632,13.417 -26.612,13.437 -26.597,13.461 -26.588,13.487 -26.582,13.543 -26.573,13.569 -26.558,13.593 -26.538,13.613 -26.514,13.628 -26.488,13.637 -26.46,13.64 -26.21,13.64 -26.182,13.637 -26.156,13.628 -26.132,13.613 -26.112,13.593 -26.097,13.569 -26.088,13.543 -26.082,13.487 -26.073,13.461 -26.058,13.437 -26.038,13.417 -26.014,13.402 -25.988,13.393 -25.96,13.39 -25.46,13.39 v1(-25.3,13.55)
  B.Cu w0.127: v1(-90.35,25.5) -90.51,25.34 -90.51,24.629 -90.221,24.34 -89.271,24.34 -88.16,23.229 -88.16,22.279 -87.571,21.69 -32.021,21.69 -27.66,17.329 -27.66,15.529 -26.21,14.079 -26.21,13.879 -25.721,13.39 -25.46,13.39 v1(-25.3,13.55)
DSI1_C_N: J16.8 Module1.187 | length 66.1
  F.Cu w0.127: v1(-71.55,25.6) -71.39,25.76 -71.39,27.515 -71.45,27.575 J16.8@-71.45,28.55 ; Module1.187@-32.62,17.8 -32.095,17.8 -32.085,17.81 -22.51,17.81 v1(-22.35,17.65)
  B.Cu w0.127: v1(-71.55,25.6) -71.39,25.44 -71.39,25.021 -70.879,24.51 -30.879,24.51 -24.179,17.81 -22.51,17.81 v1(-22.35,17.65)
DSI1_C_P: J16.9 Module1.189 | length 66.1
  F.Cu w0.127: J16.9@-70.95,28.55 -70.95,27.575 -71.01,27.515 -71.01,25.76 v1(-70.85,25.6) ; Module1.189@-32.62,18.2 -32.095,18.2 -32.085,18.19 -25.54,18.19 -25.512,18.193 -25.486,18.202 -25.462,18.217 -25.442,18.237 -25.427,18.261 -25.418,18.287 -25.412,18.343 -25.403,18.369 -25.388,18.393 -25.368,18.413 -25.344,18.428 -25.318,18.437 -25.29,18.44 -25.19,18.44 -25.162,18.437 -25.136,18.428 -25.112,18.413 -25.092,18.393 -25.077,18.369 -25.068,18.343 -25.062,18.287 -25.053,18.261 -25.038,18.237 -25.018,18.217 -24.994,18.202 -24.968,18.193 -24.94,18.19 -24.84,18.19 -24.812,18.193 -24.786,18.202 -24.762,18.217 -24.742,18.237 -24.727,18.261 -24.718,18.287 -24.712,18.343 -24.703,18.369 -24.688,18.393 -24.668,18.413 -24.644,18.428 -24.618,18.437 -24.59,18.44 -24.49,18.44 -24.462,18.437 -24.436,18.428 -24.412,18.413 -24.392,18.393 -24.377,18.369 -24.368,18.343 -24.362,18.287 -24.353,18.261 -24.338,18.237 -24.318,18.217 -24.294,18.202 -24.268,18.193 -24.24,18.19 -22.51,18.19 v1(-22.35,18.35)
  B.Cu w0.127: v1(-70.85,25.6) -71.01,25.44 -71.01,25.179 -70.721,24.89 -30.721,24.89 -24.021,18.19 -22.51,18.19 v1(-22.35,18.35)
DSI1_D0_N: J16.2 Module1.175 | length 67.7
  F.Cu w0.127: v1(-74.55,25.6) -74.39,25.76 -74.39,27.515 -74.45,27.575 J16.2@-74.45,28.55 ; Module1.175@-32.62,15.4 -32.095,15.4 -32.085,15.41 -25.46,15.41 v1(-25.3,15.25)
  B.Cu w0.127: v1(-74.55,25.6) -74.39,25.44 -74.39,24.729 -74.679,24.44 -74.929,24.44 -75.39,23.979 -75.39,23.421 -74.879,22.91 -31.579,22.91 -26.44,17.771 -26.44,16.021 -25.829,15.41 -25.46,15.41 v1(-25.3,15.25)
DSI1_D0_P: J16.3 Module1.177 | length 67.7
  F.Cu w0.127: J16.3@-73.95,28.55 -73.95,27.575 -74.01,27.515 -74.01,25.76 v1(-73.85,25.6) ; Module1.177@-32.62,15.8 -32.095,15.8 -32.085,15.79 -28.57,15.79 -28.542,15.793 -28.516,15.802 -28.492,15.817 -28.472,15.837 -28.457,15.861 -28.448,15.887 -28.442,15.943 -28.433,15.969 -28.418,15.993 -28.398,16.013 -28.374,16.027 -28.348,16.037 -28.32,16.04 -28.31,16.04 -28.282,16.037 -28.256,16.027 -28.232,16.013 -28.212,15.993 -28.197,15.969 -28.188,15.943 -28.182,15.887 -28.173,15.861 -28.158,15.837 -28.138,15.817 -28.114,15.802 -28.088,15.793 -28.06,15.79 -28.07,15.79 -28.042,15.793 -28.016,15.802 -27.992,15.817 -27.972,15.837 -27.957,15.861 -27.948,15.887 -27.942,15.943 -27.933,15.969 -27.918,15.993 -27.898,16.013 -27.874,16.027 -27.848,16.037 -27.82,16.04 -27.81,16.04 -27.782,16.037 -27.756,16.027 -27.732,16.013 -27.712,15.993 -27.697,15.969 -27.688,15.943 -27.682,15.887 -27.673,15.861 -27.658,15.837 -27.638,15.817 -27.614,15.802 -27.588,15.793 -27.56,15.79 -25.46,15.79 v1(-25.3,15.95)
  B.Cu w0.127: v1(-73.85,25.6) -74.01,25.44 -74.01,24.571 -74.521,24.06 -74.771,24.06 -75.01,23.821 -75.01,23.579 -74.721,23.29 -31.421,23.29 -26.06,17.929 -26.06,16.179 -25.671,15.79 -25.46,15.79 v1(-25.3,15.95)
DSI1_D1_N: J16.5 Module1.181 | length 66
  F.Cu w0.127: v1(-73.05,26.9) -72.89,27.06 -72.89,27.515 -72.95,27.575 J16.5@-72.95,28.55 ; Module1.181@-32.279,16.61 -32.179,16.51 -23.86,16.51 v1(-23.7,16.35)
  B.Cu w0.127: v1(-73.05,26.9) -72.89,26.74 -72.89,24.321 -72.279,23.71 -31.279,23.71 -25.49,17.921 -25.49,17.121 -24.879,16.51 -23.86,16.51 v1(-23.7,16.35)
DSI1_D1_P: J16.6 Module1.183 | length 66
  F.Cu w0.127: J16.6@-72.45,28.55 -72.45,27.575 -72.51,27.515 -72.51,27.06 v1(-72.35,26.9) ; Module1.183@-32.36,16.99 -32.121,16.99 -32.021,16.89 -31.44,16.89 -31.413,16.893 -31.387,16.902 -31.364,16.917 -31.344,16.936 -31.33,16.959 -31.32,16.985 -31.314,17.04 -31.305,17.066 -31.291,17.089 -31.271,17.108 -31.248,17.123 -31.222,17.132 -31.195,17.135 -31.08,17.135 -31.053,17.132 -31.027,17.123 -31.004,17.108 -30.984,17.089 -30.97,17.066 -30.96,17.04 -30.954,16.985 -30.945,16.959 -30.931,16.936 -30.911,16.917 -30.888,16.902 -30.862,16.893 -30.835,16.89 -30.72,16.89 -30.693,16.893 -30.667,16.902 -30.644,16.917 -30.624,16.936 -30.61,16.959 -30.6,16.985 -30.594,17.04 -30.585,17.066 -30.571,17.089 -30.551,17.108 -30.528,17.123 -30.502,17.132 -30.475,17.135 -30.36,17.135 -30.333,17.132 -30.307,17.123 -30.284,17.108 -30.264,17.089 -30.25,17.066 -30.24,17.04 -30.234,16.985 -30.225,16.959 -30.211,16.936 -30.191,16.917 -30.168,16.902 -30.142,16.893 -30.115,16.89 -23.86,16.89 v1(-23.7,17.05)
  B.Cu w0.127: v1(-72.35,26.9) -72.51,26.74 -72.51,24.479 -72.121,24.09 -31.121,24.09 -25.11,18.079 -25.11,17.279 -24.721,16.89 -23.86,16.89 v1(-23.7,17.05)
DSI1_D2_N: J16.11 Module1.193 | length 66.8
  F.Cu w0.127: v1(-70.05,26.9) -69.89,27.06 -69.89,27.515 -69.95,27.575 J16.11@-69.95,28.55 ; Module1.193@-32.62,19 -32.095,19 -32.085,19.01 -20.86,19.01 v1(-20.7,18.85)
  B.Cu w0.127: v1(-70.05,26.9) -69.89,26.74 -69.89,26.121 -69.079,25.31 -30.379,25.31 -24.079,19.01 -20.86,19.01 v1(-20.7,18.85)
DSI1_D2_P: J16.12 Module1.195 | length 66.7
  F.Cu w0.127: J16.12@-69.45,28.55 -69.45,27.575 -69.51,27.515 -69.51,27.06 v1(-69.35,26.9) ; Module1.195@-32.62,19.4 -32.095,19.4 -32.085,19.39 -26.11,19.39 -26.082,19.393 -26.056,19.402 -26.032,19.417 -26.012,19.437 -25.997,19.461 -25.988,19.487 -25.982,19.543 -25.973,19.569 -25.958,19.593 -25.938,19.613 -25.914,19.628 -25.888,19.637 -25.86,19.64 -25.76,19.64 -25.732,19.637 -25.706,19.628 -25.682,19.613 -25.662,19.593 -25.647,19.569 -25.638,19.543 -25.632,19.487 -25.623,19.461 -25.608,19.437 -25.588,19.417 -25.564,19.402 -25.538,19.393 -25.51,19.39 -25.41,19.39 -25.382,19.393 -25.356,19.402 -25.332,19.417 -25.312,19.437 -25.297,19.461 -25.288,19.487 -25.282,19.543 -25.273,19.569 -25.258,19.593 -25.238,19.613 -25.214,19.628 -25.188,19.637 -25.16,19.64 -25.06,19.64 -25.032,19.637 -25.006,19.628 -24.982,19.613 -24.962,19.593 -24.947,19.569 -24.938,19.543 -24.932,19.487 -24.923,19.461 -24.908,19.437 -24.888,19.417 -24.864,19.402 -24.838,19.393 -24.81,19.39 -20.86,19.39 v1(-20.7,19.55)
  B.Cu w0.127: v1(-69.35,26.9) -69.51,26.74 -69.51,26.279 -68.921,25.69 -30.221,25.69 -23.921,19.39 -20.86,19.39 v1(-20.7,19.55)
DSI1_D3_N: J16.14 Module1.194 | length 63.5
  F.Cu w0.127: J16.14@-68.45,28.55 -68.45,27.575 -68.39,27.515 -68.39,27.021 -67.979,26.61 -66.96,26.61 v1(-66.8,26.45) ; Module1.194@-35.7,19 -35.175,19 -35.165,19.01 -34.521,19.01 -33.71,19.821 -33.71,20.421 -33.521,20.61 -30.079,20.61 -29.679,20.21 -23.36,20.21 v1(-23.2,20.05)
  B.Cu w0.127: v1(-66.8,26.45) -66.64,26.61 -65.279,26.61 -64.779,26.11 -29.979,26.11 -24.079,20.21 -23.36,20.21 v1(-23.2,20.05)
DSI1_D3_P: J16.15 Module1.196 | length 63.5
  F.Cu w0.127: J16.15@-67.95,28.55 -67.95,27.575 -68.01,27.515 -68.01,27.179 -67.821,26.99 -66.96,26.99 v1(-66.8,27.15) ; Module1.196@-35.7,19.4 -35.175,19.4 -35.165,19.39 -34.679,19.39 -34.09,19.979 -34.09,20.579 -33.679,20.99 -29.921,20.99 -29.521,20.59 -26.44,20.59 -26.412,20.593 -26.386,20.602 -26.362,20.617 -26.342,20.637 -26.327,20.661 -26.318,20.687 -26.312,20.743 -26.303,20.769 -26.288,20.793 -26.268,20.813 -26.244,20.828 -26.218,20.837 -26.19,20.84 -25.99,20.84 -25.962,20.837 -25.936,20.828 -25.912,20.813 -25.892,20.793 -25.877,20.769 -25.868,20.743 -25.862,20.687 -25.853,20.661 -25.838,20.637 -25.818,20.617 -25.794,20.602 -25.768,20.593 -25.74,20.59 -25.54,20.59 -25.512,20.593 -25.486,20.602 -25.462,20.617 -25.442,20.637 -25.427,20.661 -25.418,20.687 -25.412,20.743 -25.403,20.769 -25.388,20.793 -25.368,20.813 -25.344,20.828 -25.318,20.837 -25.29,20.84 -25.09,20.84 -25.062,20.837 -25.036,20.828 -25.012,20.813 -24.992,20.793 -24.977,20.769 -24.968,20.743 -24.962,20.687 -24.953,20.661 -24.938,20.637 -24.918,20.617 -24.894,20.602 -24.868,20.593 -24.84,20.59 -23.36,20.59 v1(-23.2,20.75)
  B.Cu w0.127: v1(-66.8,27.15) -66.64,26.99 -65.121,26.99 -64.621,26.49 -29.821,26.49 -23.921,20.59 -23.36,20.59 v1(-23.2,20.75)
EEPROM_nWP: J2.4 Module1.20 | length 67.9
  F.Cu w0.13: J2.4@-54.66,33.44 -53.42,32.2 -51.5,32.2 -50.8,31.5 -50.8,30.2 -47.18,26.58 v1(-29,26.58) ; v1(-16.65,18) -8.9,10.25 -8.9,7 -5.8,3.9 -2.74,3.9 -2.44,4.2 Module1.20@-1.78,4.2
  B.Cu w0.13: v1(-29,26.58) -28.47,26.05 -26.05,26.05 -19.3,19.3 -18.75,19.3 -17.45,18 v1(-16.65,18)
ETH_LEDG: Module1.15 R3.2 | length 57.2
  F.Cu w0.13: R3.2@-34.3,-32.6 -34.3,-27.2 -26.1,-19 -17.2,-19 v1(-2.3,-4.1) ; v1(-1,-2.6) 2.48,0.88 2.48,2.75 1.83,3.4 Module1.15@1.3,3.4
  B.Cu w0.13: v1(-2.3,-4.1) -2.3,-3.9 v1(-1,-2.6)
ETH_LEDY: Module1.17 R2.2 | length 59.3
  F.Cu w0.13: R2.2@-36,-32.515 -36,-28.1 -26.5,-18.6 -17.6,-18.6 -2.5,-3.5 -1.278,-3.5 2.8,0.578 2.8,2.882 1.882,3.8 Module1.17@1.3,3.8
GLOBAL_EN: J1.1 J2.14 Module1.99 U14.4 | length 196.2
  F.Cu w0.13: U14.4@-67.507,-13.722 -61.8,-8.015 -61.8,0.9 -60.9,1.8 -54.3,1.8 v1(-52.8,0.3) ; J2.14@-41.96,33.44 -37.22,28.7 -16.5,28.7 v1(-14,26.2) ; v1(-34.5,-10.8) -32.6,-10.8 -29.4,-14 -22.7,-14 -18.3,-9.6 -18.3,13.55 v1(-17.55,14.3) ; v1(0.4,20.68) 0.82,20.68 Module1.99@1.3,20.2
  F.Cu w0.17: J1.1@-99.16,-30.56 -89.4,-20.8 -73.6,-20.8 -67.632,-14.832 U14.4@-67.632,-13.722
  B.Cu w0.13: v1(-52.8,0.3) -41.7,-10.8 v1(-34.5,-10.8) ; v1(-17.55,14.3) -16.832,14.3 -16.232,14.9 -11.9,14.9 -9.8,17 ; v1(-14,26.2) -11.3,23.5 -11.3,18.5 -9.8,17 ; v1(0.4,20.68) 0.235,20.515 -6.285,20.515 -9.8,17

## Text inside footprints (layer, text, board x,y; h text height)
BT1: F.Fab "${REFERENCE}" at -102.388,-21.873 h1 r90
C1: F.Fab "${REFERENCE}" at -43.67,-34.096 h0.25 r90
C2: F.Fab "${REFERENCE}" at -11.091,-23.361 h0.5
C3: F.Fab "${REFERENCE}" at -20.92,-36.721 h0.25 r90
C4: F.Fab "${REFERENCE}" at -11.995,-33.121 h0.25 r90
C5: F.Fab "${REFERENCE}" at 0.859,-38.811 h0.5
C6: F.Fab "${REFERENCE}" at -12.739,-28.591 h0.5 r90
C7: F.Fab "${REFERENCE}" at -22.87,-21.996 h0.25 r90
C8: F.Fab "${REFERENCE}" at -22.97,-34.596 h0.25 r90
C9: F.Fab "${REFERENCE}" at -22.97,-32.396 h0.25 r90
C10: F.Fab "${REFERENCE}" at -23.013,-27.305 h0.5
C11: F.Fab "${REFERENCE}" at -12.01,-36.168 h0.25 r90
C12: F.Fab "${REFERENCE}" at -84.42,-45.296 h0.25 r90
C13: F.Fab "${REFERENCE}" at -78.97,-45.396 h0.25 r90
C14: F.Fab "${REFERENCE}" at -20.766,-31.564 h0.25 r90
C15: F.Fab "${REFERENCE}" at -15.092,-38.083 h0.25 r135
C16: F.Fab "${REFERENCE}" at -6.773,-26.512 h1
C17: F.Fab "${REFERENCE}" at -32.045,-37.166 h0.5
C18: F.Fab "${REFERENCE}" at 9.412,14.627 h1 r90
C19: F.Fab "${REFERENCE}" at -7.829,-32.461 h0.5
C20: F.Fab "${REFERENCE}" at -28.391,-37.661 h0.5
C21: F.Fab "${REFERENCE}" at -11.891,-32.461 h0.5
C22: F.Fab "${REFERENCE}" at -69.524,-11.27 h0.25
C23: F.Fab "${REFERENCE}" at 5.73,27.304 h0.25 r90
C24: F.Fab "${REFERENCE}" at -73.858,-13.286 h0.25
C25: F.Fab "${REFERENCE}" at 28.009,-25.761 h0.5
C26: F.Fab "${REFERENCE}" at 31.559,-25.761 h0.5
C27: F.Fab "${REFERENCE}" at 28.009,-27.661 h0.5
C28: F.Fab "${REFERENCE}" at 31.559,-27.661 h0.5
C29: F.Fab "${REFERENCE}" at 30.38,-14.858 h0.25 r90
C30: F.Fab "${REFERENCE}" at 22.509,-21.173 h0.5
C31: F.Fab "${REFERENCE}" at 22.509,-23.273 h0.5
C32: F.Fab "${REFERENCE}" at 22.561,-26.354 h0.5 r90
C33: F.Fab "${REFERENCE}" at 20.461,-26.354 h0.5 r90
C34: F.Fab "${REFERENCE}" at 28.059,4.889 h0.5
C35: F.Fab "${REFERENCE}" at 31.609,4.889 h0.5
C36: F.Fab "${REFERENCE}" at 36.204,-39.63 h0.25
C37: F.Fab "${REFERENCE}" at 31.609,3.039 h0.5
C38: F.Fab "${REFERENCE}" at 28.059,3.039 h0.5
C39: F.Fab "${REFERENCE}" at 31.609,1.189 h0.5
C40: F.Fab "${REFERENCE}" at 29.63,-34.946 h0.25 r90
C41: F.Fab "${REFERENCE}" at 28.059,1.189 h0.5
C42: F.Fab "${REFERENCE}" at 35.809,-33.261 h0.5
C43: F.Fab "${REFERENCE}" at 28.009,-29.561 h0.5
C44: F.Fab "${REFERENCE}" at 31.559,-29.561 h0.5
C45: F.Fab "${REFERENCE}" at 18.377,-8.362 h1
C46: F.Fab "${REFERENCE}" at -90.596,-18.93 h0.25
C47: F.Fab "${REFERENCE}" at 22.609,9.539 h0.5
C49: F.Fab "${REFERENCE}" at 22.609,7.389 h0.5
C51: F.Fab "${REFERENCE}" at 20.511,4.421 h0.5 r90
C52: F.Fab "${REFERENCE}" at 22.661,4.409 h0.5 r90
C57: F.Fab "${REFERENCE}" at 30.48,16.054 h0.25 r90
C58: F.Fab "${REFERENCE}" at 35.93,6.954 h0.25 r90
C59: F.Fab "${REFERENCE}" at 30.939,14.47 h0.25
C60: F.Fab "${REFERENCE}" at 31.83,15.254 h0.25 r90
C61: F.Fab "${REFERENCE}" at 35.78,13.854 h0.25 r90
C62: F.Fab "${REFERENCE}" at 35.88,-23.458 h0.25 r90
C63: F.Fab "${REFERENCE}" at 30.904,-16.343 h0.25
C64: F.Fab "${REFERENCE}" at 31.83,-15.608 h0.25 r90
C65: F.Fab "${REFERENCE}" at 35.68,-16.608 h0.25 r90
D1: F.Fab "${REFERENCE}" at -85.409,-53.865 h0.4
D2: F.Fab "${REFERENCE}" at -81.759,-53.865 h0.4
D3: F.Fab "${REFERENCE}" at -89.844,-11.886 h0.5 r90
D4: F.Fab "${REFERENCE}" at 30.412,-38.323 h1 r90
H1: F.Fab "${REFERENCE}" at -110.673,-47.512 h1
H2: F.Fab "${REFERENCE}" at -118.173,-52.012 h1
H3: F.Fab "${REFERENCE}" at -118.173,-3.012 h1
H4: F.Fab "${REFERENCE}" at -60.173,-52.012 h1
H5: F.Fab "${REFERENCE}" at -60.173,-3.012 h1
H6: F.Fab "${REFERENCE}" at 23.327,21.488 h1
H7: F.Fab "${REFERENCE}" at -110.673,21.488 h1
H8: F.Fab "${REFERENCE}" at 23.327,-47.512 h1
J1: F.Fab "${REFERENCE}" at -106.473,-31.512 h1
J2: F.Fab "${REFERENCE}" at -54.353,31.258 h1
J3: F.Fab "${REFERENCE}" at 3.987,31.988 h1
J4: F.Fab "${REFERENCE}" at -114.988,7.127 h1 r90
J5: F.Fab "${REFERENCE}" at -110.473,33.188 h1
J6: F.Fab "${REFERENCE}" at -79.303,2.558 h1
J7: F.Fab "${REFERENCE}" at 0.182,-46.437 h1; Cmts.User "KEEPOUT" at 4.354,-52.11 h0.4
J8: F.Fab "${REFERENCE}" at -89.473,-3.062 h1
J9: F.Fab "${REFERENCE}" at -54.788,-13.013 h1 r90
J11: F.Fab "${REFERENCE}" at -13.973,-55.012 h1; Dwgs.User "PCB edge" at -10.923,-54.428 h0.5; Dwgs.User "PCB Edge" at -10.559,-55.877 h0.4
J14: F.Fab "${REFERENCE}" at -7.018,-45.853 h1 r90